# EAGLE board WirelessReceiver (EAGLE 9.6.2)
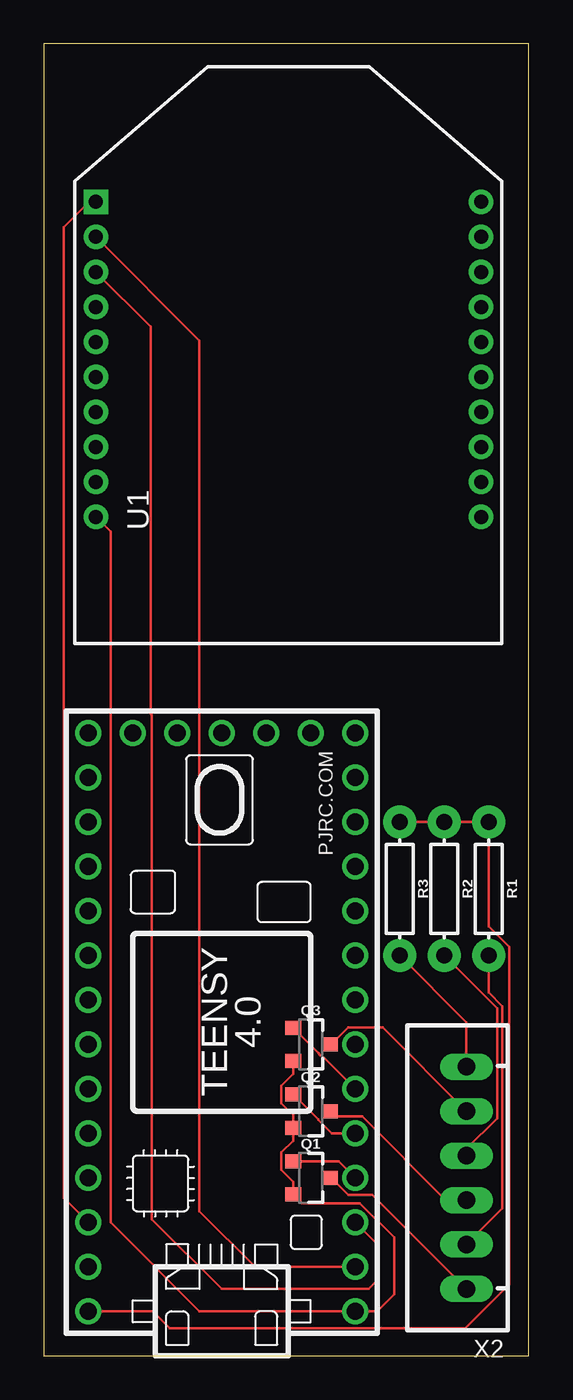
[diagram p0: board, top side]

Size 27.69 x 74.93 mm. Coordinates in mm from the lower left corner, seen from the top.
Outline: 0,0 27.69,0 27.69,74.93 0,74.93 0,0
Copper layers (1*16): Top 0.035mm / dielectric 1.6mm / Bottom 0.035mm
Design rules "designrulecheck_jlcpcb_2layers": minimum track width 5mil, minimum drill 0.2mm, track to track 5mil, track to pad 5mil, pad to pad 5mil, via to via 5mil, smd to smd 5mil, copper to edge 0.2mm, drill to drill 6mil, minimum pad ring 10mil, minimum via ring 8mil, stop-mask expansion 4mil, vias tented up to drill 0mil, thermal gap 10mil

## Footprints (pad centres in the part's own frame; a part is rotated, then mirrored left to right if it is on the bottom)
SOT23-3 = smd 0.8 x 0.9: 1 -0.95,-1; 2 0.95,-1; 3 0,1.1
AXIAL-0.3 = drill 0.9 pad 1.88: P$1 -3.81,0; P$2 3.81,0
XBEE_PRO_S3B = drill 0.8 pad 1.4 square: 1 -11,8.75 | drill 0.8 pad 1.4: 2 -11,6.75; 3 -11,4.75; 4 -11,2.75; 5 -11,0.75; 6 -11,-1.25; 7 -11,-3.25; 8 -11,-5.25; 9 -11,-7.25; 10 -11,-9.25; 11 11,-9.25; 12 11,-7.25; 13 11,-5.25; 14 11,-3.25; 15 11,-1.25; 16 11,0.75; 17 11,2.75; 18 11,4.75; 19 11,6.75; 20 11,8.75
TEENSY_4.0-BASIC = drill 0.965: 0/RX -13.97,-7.62; 1/TX -11.43,-7.62; 2 -8.89,-7.62; 3/CANTX -6.35,-7.62; 3V3_LN 16.51,-2.54; 3V3_LO -11.43,7.62; 4/CANRX -3.81,-7.62; 5 -1.27,-7.62; 6 1.27,-7.62; 7 3.81,-7.62; 8 6.35,-7.62; 9/CS 8.89,-7.62; 10/CS 11.43,-7.62; 11/MOSI 13.97,-7.62; 12/MISO 16.51,-7.62; 13/SCK 16.51,7.62; 14/A0 13.97,7.62; 15/A1 11.43,7.62; 16/A2 8.89,7.62; 17/A3 6.35,7.62; 18/A4/SDA 3.81,7.62; 19/A5/SCL 1.27,7.62; 20/A6 -1.27,7.62; 21/A7 -3.81,7.62; 22/A8 -6.35,7.62; 23/A9 -8.89,7.62; GND -16.51,-7.62; GND2 -13.97,7.62; GND3 16.51,0; ON/OFF 16.51,5.08; PROG 16.51,2.54; VBAT\ 16.51,-5.08; VIN -16.51,7.62
JST-XH-06-PACKAGE-LONG-PAD = drill 1.016 long: 1 -6.35,0; 2 -3.81,0; 3 -1.27,0; 4 1.27,0; 5 3.81,0; 6 6.35,0

## Placement (x,y rotation side)
FRAME1  FRAME-LETTERNO_PACKAGE  [DUMMY]  -20.32,67.31 0 top  (outside the outline)
Q1  600mA/40V  [SOT23-3]  15.24,10.16 270 top
Q2  600mA/40V  [SOT23-3]  15.24,13.97 270 top
Q3  600mA/40V  [SOT23-3]  15.24,17.78 270 top
R1  100  [AXIAL-0.3]  25.4,26.67 270 top
R2  100  [AXIAL-0.3]  22.86,26.67 270 top
R3  100  [AXIAL-0.3]  20.32,26.67 270 top
U1  XBEE_PRO_S3B  [XBEE_PRO_S3B]  13.97,57.15 0 top
U$1  TEENSY_4.0-BASIC  [TEENSY_4.0-BASIC]  10.16,19.05 90 top
X2  JST-XH-06-PIN-LONG-PAD  [JST-XH-06-PACKAGE-LONG-PAD]  24.13,10.16 90 top

## Library data of the parts
FRAME1 = SparkFun-Aesthetics; DESIGNER: Nobody; VERSION: v01
Q1-Q3 = SparkFun-DiscreteSemi; PROD_ID: TRANS-08049
R1-R3 = SparkFun-Resistors; PROD_ID: RES-12181
U1 = GTOR - Microcontroller; DESCRIPTION: General ISM < 1GHz Transceiver Module 900MHz Antenna Not Included, RP-SMA Through Hole; DIGI-KEY_PART_NUMBER: 602-1293-ND; MF: Digi International; MP: XBP9B-XCST-001; PACKAGE: Module Digi International
U$1 = Teensy-4.0
X2 = Rembrandt Electronics - JST XH Connectors v1-0

## Nets
3V3: U1.1 U$1.3V3_LO
5V: R1.P$1 R2.P$1 R3.P$1 U$1.VIN
GND: Q1.2 Q2.2 Q3.2 U1.10 U$1.GND
N$3: R1.P$2 X2.2
N$4: R2.P$2 X2.4
N$5: R3.P$2 X2.6
N$6: Q1.3 X2.1
N$7: Q2.3 X2.3
N$8: Q3.3 X2.5
N$9: Q1.1 U$1.2
N$10: Q2.1 U$1.3/CANTX
N$11: Q3.1 U$1.4/CANRX
RX1: U1.2 U$1.0/RX
TX1: U1.3 U$1.1/TX

## Tracks (layer width: path | path; a pad name or v marks a point on that pad's centre or on a via)
3V3
  Top 0.152: U1.1 2.59,65.9 1.14,64.45 1.14,9.02 U$1.3V3_LO
5V
  Top 0.152: R1.P$1 R2.P$1 R3.P$1 R1.P$1 | U$1.VIN 6.22,2.54 7.19,1.57 24.06,1.57 26.57,4.08 26.57,23.34 25.4,24.51 R1.P$1
GND
  Top 0.152: Q3.2 14.24,16.09 13.56,15.41 13.56,14.43 14.24,13.75 Q2.2 14.24,12.28 13.56,11.61 13.56,10.62 14.24,9.94 Q1.2 14.74,8.71 18.05,8.71 20.02,6.75 20.02,3.5 19.05,2.54 U$1.GND 8.89,2.54 3.81,7.62 3.81,47.06 U1.10
N$3
  Top 0.152: R1.P$2 25.4,20.75 26.19,19.96 26.19,8.41 X2.2
N$4
  Top 0.152: X2.4 24.13,11.81 25.88,13.56 25.88,19.84 R2.P$2
N$5
  Top 0.152: R3.P$2 24.13,19.05 X2.6
N$6
  Top 0.152: X2.1 18.75,9.2 17.38,9.2 16.41,10.16 Q1.3
N$7
  Top 0.152: Q2.3 16.64,13.66 18.18,13.66 22.95,8.89 X2.3
N$8
  Top 0.152: Q3.3 16.41,17.78 17.38,18.75 19.36,18.75 X2.5
N$9
  Top 0.152: Q1.1 16.83,11.11 U$1.2
N$10
  Top 0.152: Q2.1 15.66,13.5 15.66,13.47 16.44,12.7 U$1.3/CANTX
N$11
  Top 0.152: U$1.4/CANRX 15.87,17.15 15.79,17.15 15.66,17.29 15.66,17.31 Q3.1
RX1
  Top 0.152: U$1.0/RX 12.06,5.08 8.89,8.26 8.89,57.98 U1.2
TX1
  Top 0.152: U1.3 6.1,58.77 6.1,36.67 6.17,36.59 6.17,7.8 10.16,3.81 18.54,3.81 19.05,4.32 19.05,6.35 U$1.1/TX